# Altium PCB SW3 Logic.PcbDoc
Units mm, origin at the board's own origin, x right, y up, seen from the top; angles counter-clockwise.
Board outline 19.46 x 86.99 mm, 2 copper layers (Top Layer, Bottom Layer), stack 1.58 mm thick; 43 components, 40 nets, 162 pads, 54 vias.
Unrouted connection lines stored in the file: 36.
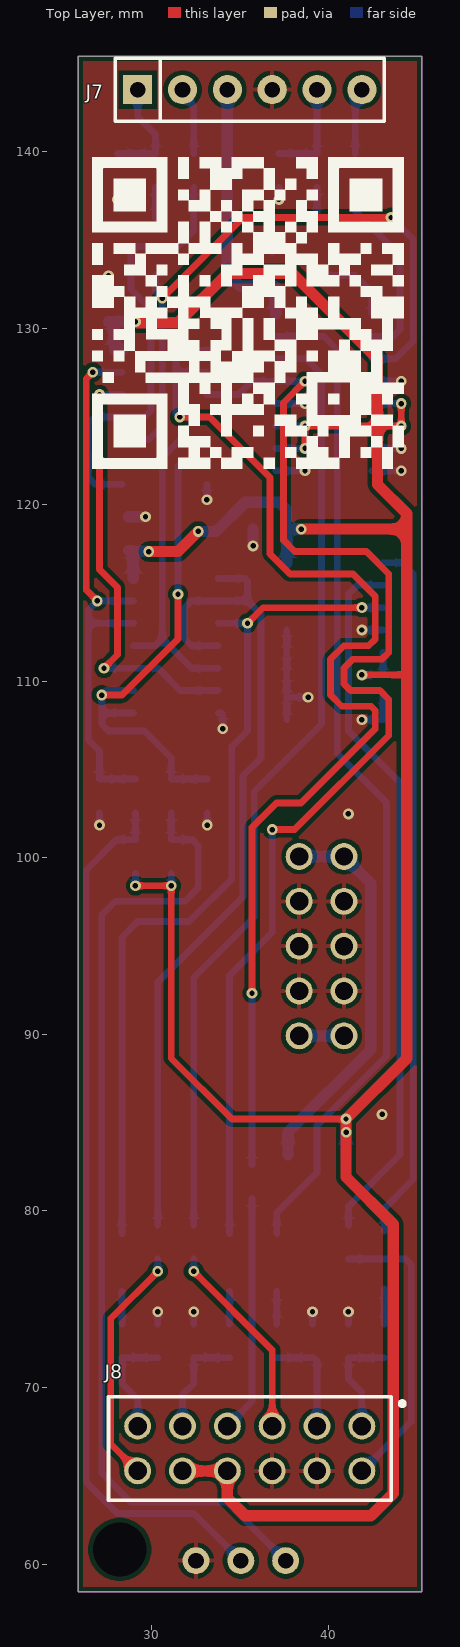
[diagram p0: Top Layer view]
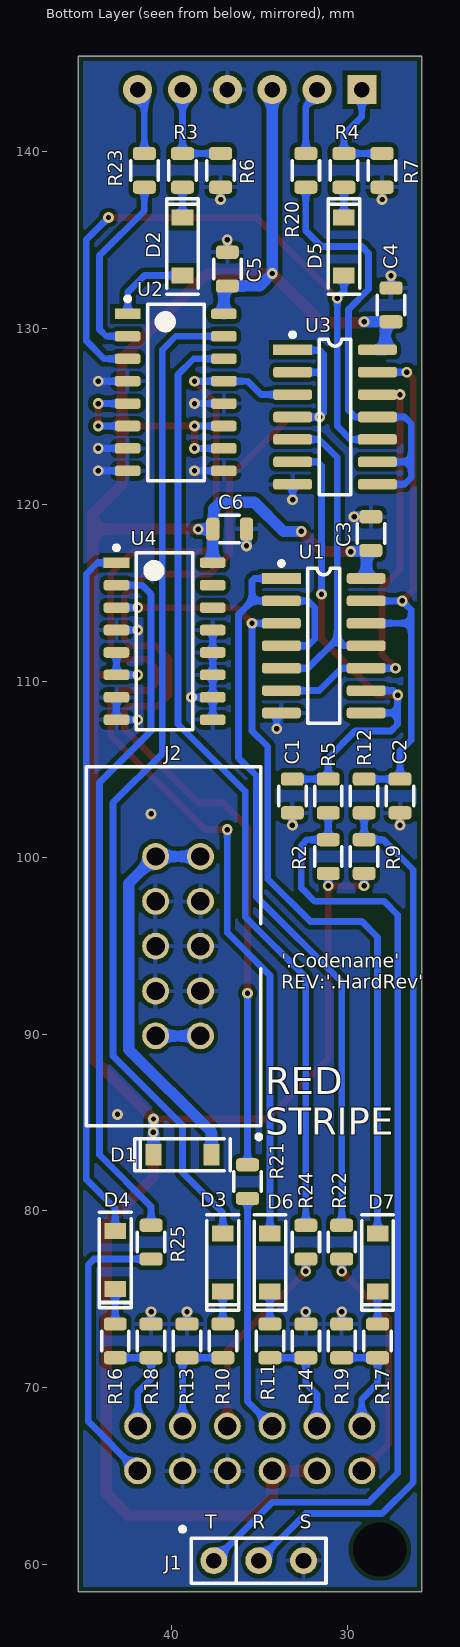
[diagram p1: Bottom Layer view, seen from below]

## Layer stack, top to bottom
Top Solder: solder mask 0.0102, Solder Resist, Dk 3.5
Top Layer: signal copper 0.0356
Dielectric 1: dielectric 1.5086, FR-4, Dk 4.8
Bottom Layer: signal copper 0.0356
Bottom Solder: solder mask 0.0102, Solder Resist, Dk 3.5

## Board outline
25.832,58.42 45.288,58.42 45.288,145.415 25.832,145.415

## Design rules (kind name [scope] priority, off if disabled: settings)
Clearance [All] p1: gap=0.254 ignorepadtopadclearanceinfootprint=FALSE except(0: Arc-Hole Track-Hole SMDPad-Hole THPad-Hole Via-Hole Fill-Hole Poly-Hole Region-Hole Text-Hole)
HoleSize [All] p1: absolutevalues=TRUE maxlimit=2539.975 minlimit=0.025 maxpercent=80.000 minpercent=20.000
PolygonConnect [All] p1: thpad.connectstyle=Relief thpad.reliefconductorwidth=0.254 thpad.reliefentries=4 thpad.polygonreliefangle="90 Angle" thpad.airgapwidth=0.254 smdpad.connectstyle=Relief smdpad.reliefconductorwidth=0.254 smdpad.reliefentries=4 smdpad.polygonreliefangle="90 Angle" smdpad.airgapwidth=0.254 via.connectstyle=Direct via.reliefconductorwidth=0.254 via.reliefentries=4 via.polygonreliefangle="90 Angle" via.airgapwidth=0.254
RoutingVias [All] p1: holewidth=0.711 width=1.27 viastyle="Through Hole" minholewidth=0.711 minwidth=1.27 maxholewidth=0.711 maxwidth=1.27
SilkToSilkClearance [All] p1: silktosilkclearance=0
SilkToSolderMaskClearance [IsPad] p1: minsilkscreentomaskgap=0 clearancetoexposedcopper=TRUE
SolderMaskExpansion [All] p1: expansion=0.102 istentingtop=FALSE
Width [All] p1: maxlimit=25.4 minlimit=0.127 preferedwidth=0.254
27 further rules are at their usual default settings.

## Components (designator, comment, footprint, x,y, rotation, side; value= is the part's Value field where it differs from the comment)
C1 "10000pF" Chip0805 33.147,103.505 r90 bottom
C2 "10000pF" Chip0805 27.051,103.505 r90 bottom
C3 "0.1µF" Chip0805 28.702,118.364 r270 bottom
C4 "0.1µF" Chip0805 27.559,131.318 r270 bottom
C5 "0.1µF" Chip0805 36.83,133.35 r270 bottom
C6 "0.1µF" Chip0805 36.703,118.618 r0 bottom
D1 "1N4148W-7-F" SOD-123 39.37,83.185 r180 bottom
D2 "1N4148W-7-F" SOD-123 39.37,134.62 r270 bottom
D3 "1N4148W-7-F" SOD-123 37.084,77.089 r90 bottom
D4 "1N4148W-7-F" SOD-123 43.18,77.216 r90 bottom
D5 "1N4148W-7-F" SOD-123 30.226,134.62 r270 bottom
D6 "1N4148W-7-F" SOD-123 34.417,77.078 r90 bottom
D7 "1N4148W-7-F" SOD-123 28.321,77.089 r90 bottom
J1 "3-644456-3" TE_3-644456-3 35.052,60.198 r180 bottom
J2 "75869-101LF" IDC_100_2x5 39.624,94.996 r90 bottom
J7 "535584-1" TE_535584-1 35.56,143.51 r0 top
J8 "5-534998-6" TE_5-534998-6 35.56,66.548 r180 top
R2 "100k" Chip0805 31.115,100.076 r270 bottom
R3 "1k" Chip0805 39.37,138.938 r270 bottom
R4 "1k" Chip0805 30.226,138.938 r270 bottom
R5 "1k" Chip0805 31.115,103.505 r90 bottom
R6 "1k" Chip0805 37.211,138.938 r90 bottom
R7 "1k" Chip0805 28.067,138.938 r90 bottom
R9 "100k" Chip0805 29.083,100.076 r270 bottom
R10 "1k" Chip0805 37.084,72.644 r90 bottom
R11 "1k" Chip0805 34.417,72.644 r90 bottom
R12 "1k" Chip0805 29.083,103.505 r90 bottom
R13 "1k" Chip0805 39.116,72.644 r270 bottom
R14 "1k" Chip0805 32.385,72.644 r270 bottom
R16 "1k" Chip0805 43.18,72.644 r90 bottom
R17 "1k" Chip0805 28.321,72.644 r90 bottom
R18 "1k" Chip0805 41.148,72.644 r270 bottom
R19 "1k" Chip0805 30.353,72.644 r270 bottom
R20 "10k" Chip0805 32.385,138.938 r90 bottom
R21 "10k" Chip0805 35.687,81.661 r270 bottom
R22 "10k" Chip0805 30.353,78.232 r270 bottom
R23 "10k" Chip0805 41.529,138.938 r270 bottom
R24 "10k" Chip0805 32.385,78.232 r90 bottom
R25 "10k" Chip0805 41.148,78.232 r90 bottom
U1 "MC14093BDR2G" 14-SOIC 31.369,112.014 r180 bottom
U2 "MC14027BDR2G" 16-SOIC 39.751,126.365 r180 bottom
U3 "MC14093BDR2G" 14-SOIC 30.734,124.968 r180 bottom
U4 "MC14027BDR2G" 16-SOIC 40.386,112.268 r180 bottom

## Footprints (in the part's own frame and the unit in brackets; to place one, negate y for a bottom-side part, rotate by r counter-clockwise, add the part's x,y. Pads: shape width x height; smd on the part's side, far side on the other; paste and mask are expansions set on the pad)
14-SOIC [mm] "SOIC, 14-Leads, Body 8.65x3.90mm, Pitch 1.27mm, IPC Medium Density"
  rect 2.2x0.6 smd: 1(-2.4,3.81)
  rrect50% 2.2x0.6 smd: 2(-2.4,2.54) 3(-2.4,1.27) 4(-2.4,0) 5(-2.4,-1.27) 6(-2.4,-2.54) 7(-2.4,-3.81) 8(2.4,-3.81) 9(2.4,-2.54) 10(2.4,-1.27) 11(2.4,0) 12(2.4,1.27) 13(2.4,2.54) 14(2.4,3.81)
  silkscreen extent -2.53,-4.4 0.9,4.78, body extent -2,-4.4 2,4.4, height 1.75
16-SOIC [mm] "SOIC, 16-Leads, Body 9.90x3.90mm, Pitch 1.27mm, IPC Medium Density"
  rect 1.45x0.6 smd: 1(-2.725,4.445)
  rrect50% 1.45x0.6 smd: 2(-2.725,3.175) 3(-2.725,1.905) 4(-2.725,0.635) 5(-2.725,-0.635) 6(-2.725,-1.905) 7(-2.725,-3.175) 8(-2.725,-4.445) 9(2.725,-4.445) 10(2.725,-3.175) 11(2.725,-1.905) 12(2.725,-0.635) 13(2.725,0.635) 14(2.725,1.905) 15(2.725,3.175) 16(2.725,4.445)
  silkscreen extent -2.85,-5 1.6,5.42, body extent -2,-5 2,5, height 1.75
Chip0805 [mm] "Chip Resistor, 2-Leads, Body 2.05x1.25mm, IPC Medium Density"
  rrect50% 0.75x1.3 smd: 1(-0.955,0) 2(0.955,0)
  silkscreen extent -0.55,-0.77 0.55,0.77, body extent -0.95,-0.55 0.95,0.55, height 0.5
IDC_100_2x5 [mil]
  round 60 hole 41: 1(-200,-50) 2(-100,-50) 3(0,-50) 4(100,-50) 5(200,-50) 6(200,50) 7(100,50) 8(0,50) 9(-100,50) 10(-200,50)
  silkscreen extent -430,-185 400,205, body extent -390,-170 394,195, height 367
SOD-123 [mm] "SOD123"
  rect 0.91x1.22 smd: 1(-1.64,0) 2(1.64,0)
  silkscreen extent -2.7,-0.9 2.7,0.9, body extent -1.92,-0.85 1.92,0.85, height 1.43
TE_3-644456-3 [mil]
  round 60 hole 35: 1(-100,0) 2(0,0) 3(100,0)
  silkscreen extent -175,-50 150,75, body extent -144,-46 144,46, height 395
TE_5-534998-6 [mil]
  round 60 hole 41: 1(-250,-50) 2(-150,-50) 3(-50,-50) 4(50,-50) 5(150,-50) 6(250,-50) 7(250,50) 8(150,50) 9(50,50) 10(-50,50) 11(-150,50) 12(-250,50)
  silkscreen extent -345,-115 315,115, body extent -300,-99 300,99, height 265
TE_535584-1 [mil]
  rect 65x65 hole 35: 1(-250,0)
  round 65 hole 35: 2(-150,0) 3(-50,0) 4(50,0) 5(150,0) 6(250,0)
  silkscreen extent -300,-70 300,70, body extent -300,-70 300,70, height 265

## Part data
C1 C2: library part C2012C0G1H103J060AA, "CAP CER 10000PF 50V 5% NP0 0805", Manufacturer="TDK Corporation", Operating Temperature="-55°C ~ 125°C", Package / Case="0805 (2012 Metric)", Ratings=-, Supplier Part Number 1=445-7519-1-ND, Temperature Coefficient="C0G, NP0", Tolerance=±5%, Voltage=50V, Applications="General Purpose", Capacitance=10000pF, Features=-, Height - Seated (Max)=-, HelpURL=http://product.tdk.com/capacitor/mlcc/en/documents/mlcc_commercial_general_en.pdf, Lead Spacing=-, Lead Style=-, Manufacturer Part Number=C2012C0G1H103J060AA, Mounting Type="Surface Mount, MLCC", PartNumber=C2012C0G1H103J060AA, Series=C, Size / Dimension="0.079\" L x 0.049\" W (2.00mm x 1.25mm)", Supplier 1=Digi-Key, Supplier 2=Mouser, Thickness (Max)="0.028\" (0.70mm)"
C3 C4 C5 C6: library part C2012X7T2E104K125AA, "CAP CER 0.1UF 250V 10% X7T 0805", Manufacturer="TDK Corporation", Operating Temperature="-55°C ~ 125°C", Package / Case="0805 (2012 Metric)", Ratings=-, Supplier Part Number 1=445-7749-1-ND, Temperature Coefficient=X7T, Tolerance=±10%, Voltage=250V, Applications="General Purpose", Capacitance=0.1µF, Features=-, Height - Seated (Max)=-, HelpURL=http://product.tdk.com/capacitor/mlcc/en/documents/mlcc_commercial_midvoltage_en.pdf, Lead Spacing=-, Lead Style=-, Manufacturer Part Number=C2012X7T2E104K125AA, Mounting Type="Surface Mount, MLCC", PartNumber=C2012X7T2E104K125AA, Series=C, Size / Dimension="0.079\" L x 0.049\" W (2.00mm x 1.25mm)", Supplier 1=Digi-Key, Supplier 2=Mouser, Thickness (Max)="0.057\" (1.45mm)"
D1 D2 D3 D4 D5 D6 D7: "DIODE SWITCH 100V 0.15A SOD123", Capacitance @ Vr, F="2pF @ 0V, 1MHz", Current - Average Rectified (Io)=150mA, Current - Reverse Leakage @ Vr="1µA @ 75V", Manufacturer="Diodes Incorporated", Operating Temperature - Junction="-65°C ~ 150°C", Package / Case=SOD-123, Supplier Part Number 1=1N4148W-FDICT-ND, Voltage - DC Reverse (Vr) (Max)=100V, Voltage - Forward (Vf) (Max) @ If="1.25V @ 150mA", Datasheets=http://www.diodes.com/datasheets/ds30086.pdf, Diode Type=Standard, Manufacturer Part Number=1N4148W-7-F, Mounting Type="Surface Mount", PartNumber=1N4148W-7-F, Reverse Recovery Time (trr)=4ns, Series=0, Speed="Small Signal =< 200mA (Io), Any Speed", Supplier 1=Digi-Key, Supplier Device Package=SOD-123
J1: "CONN HEADER VERT 3POS .100 TIN", Color=Natural, Manufacturer="TE Connectivity", Supplier Part Number 1=A31113-ND, Connector Type="Header, Unshrouded", Contact Finish=Tin, Contact Finish Thickness="150µin (3.81µm)", Contact Mating Length="0.295\" (7.49mm)", Contact Type="Male Pin", Fastening Type=-, Features=-, HelpURL=http://www.te.com/commerce/DocumentDelivery/DDEController?Action=srchrtrv&DocNm=644456&DocType=Customer+Drawing&DocLang=English, Manufacturer Part Number=3-644456-3, Mounting Type="Through Hole", Number of Positions=3, Number of Positions Loaded=All, Number of Rows=1, PartNumber=3-644456-3, Pitch="0.100\" (2.54mm)", Row Spacing=-, Series="MTA-100, AMP", Supplier 1=Digi-Key, Supplier 2=Mouser, Supplier Part Number 2=571-3-644456-3, Termination=Solder
J2: "CONN HEADER 10POS DUAL VERT PCB", Color=Blue, Manufacturer=FCI, Supplier Part Number 1=609-1774-ND, Connector Type="Header, Shrouded", Contact Finish="Gold, GXT™", Contact Finish Thickness="30µin (0.76µm)", Contact Mating Length="0.236\" (6.00mm)", Contact Type="Male Pin", Fastening Type=-, Features=-, HelpURL=http://portal.fciconnect.com/Comergent//fci/drawing/75869.pdf, Manufacturer Part Number=75869-101LF, Mounting Type="Through Hole", Number of Positions=10, Number of Positions Loaded=All, Number of Rows=2, PartNumber=75869-101LF, Pitch="0.100\" (2.54mm)", Row Spacing="0.100\" (2.54mm)", Series="Quickie™, Basics+", Supplier 1=Digi-Key, Supplier 2=Mouser, Supplier Part Number 2=649-75869-101LF, Termination=Solder
J7: "CONN RECEPT 6POS .100 VERT", Manufacturer="TE Connectivity AMP Connectors", Supplier Part Number 1=A115379-ND, HelpURL=https://www.te.com/commerce/DocumentDelivery/DDEController?Action=srchrtrv&DocNm=535584&DocType=Customer+Drawing&DocLang=English, Manufacturer Part Number=535584-1, PartNumber=535584-1, Supplier 1=Digi-Key, Supplier 2=Mouser, Supplier Part Number 2=571-535584-1
J8: "CONN RECEPT 12POS .100 VERT DUAL", Color=Black, Manufacturer="TE Connectivity AMP Connectors", Supplier Part Number 1=A32956-ND, Connector Type="Receptacle, Bottom or Top Entry", Contact Finish=Gold, Contact Finish Thickness="30µin (0.76µm)", Contact Type="Female Socket", Fastening Type=-, Features=-, HelpURL=http://www.te.com/commerce/DocumentDelivery/DDEController?Action=srchrtrv&DocNm=534998&DocType=Customer+Drawing&DocLang=English, Manufacturer Part Number=5-534998-6, Mounting Type="Through Hole", Number of Positions=12, Number of Positions Loaded=All, Number of Rows=2, PartNumber=5-534998-6, Pitch="0.100\" (2.54mm)", Row Spacing="0.100\" (2.54mm)", Series="AMPMODU Mod IV", Supplier 1=Digi-Key, Supplier 2=Mouser, Supplier Part Number 2=571-5-534998-6, Termination=Solder
R2 R9: library part CRCW0805100KFKEA, "RES 100K OHM 1/8W 1% 0805 SMD", Manufacturer="Vishay Dale", Package / Case="0805 (2012 Metric)", Power (Watts)="0.125W, 1/8W", Supplier Part Number 1=541-100KCCT-ND, Temperature Coefficient=±100ppm/°C, Tolerance=±1%, Composition="Thick Film", Features="Automotive AEC-Q200 Qualified", Height="0.020\" (0.50mm)", HelpURL=http://www.vishay.com/doc?20035, Manufacturer Part Number=CRCW0805100KFKEA, Number of Terminations=2, PartNumber=CRCW0805100KFKEA, Resistance=100k, Series=CRCW, Size / Dimension="0.079\" L x 0.049\" W (2.00mm x 1.25mm)", Supplier 1=Digi-Key, Supplier 2=Mouser, Supplier Device Package="0805 (2012 Metric)"
R3 R4 R5 R6 R7 R10 R11 R12 R13 R14 R16 R17 R18 R19: library part CRCW08051K00FKEA, "RES 1.00K OHM 1/8W 1% 0805 SMD", Manufacturer="Vishay Dale", Package / Case="0805 (2012 Metric)", Power (Watts)="0.125W, 1/8W", Supplier Part Number 1=541-1.00KCCT-ND, Temperature Coefficient=±100ppm/°C, Tolerance=±1%, Composition="Thick Film", Features="Automotive AEC-Q200 Qualified", Height="0.020\" (0.50mm)", HelpURL=http://www.vishay.com/doc?20035, Manufacturer Part Number=CRCW08051K00FKEA, Number of Terminations=2, PartNumber=CRCW08051K00FKEA, Resistance=1k, Series=CRCW, Size / Dimension="0.079\" L x 0.049\" W (2.00mm x 1.25mm)", Supplier 1=Digi-Key, Supplier 2=Mouser, Supplier Device Package="0805 (2012 Metric)"
R20 R21 R22 R23 R24 R25: library part CRCW080510K0FKEA, "RES 10.0K OHM 1/8W 1% 0805 SMD", Manufacturer="Vishay Dale", Package / Case="0805 (2012 Metric)", Power (Watts)="0.125W, 1/8W", Supplier Part Number 1=541-10.0KCCT-ND, Temperature Coefficient=±100ppm/°C, Tolerance=±1%, Composition="Thick Film", Features="Automotive AEC-Q200 Qualified", Height="0.020\" (0.50mm)", HelpURL=http://www.vishay.com/doc?20035, Manufacturer Part Number=CRCW080510K0FKEA, Number of Terminations=2, PartNumber=CRCW080510K0FKEA, Resistance=10k, Series=CRCW, Size / Dimension="0.079\" L x 0.049\" W (2.00mm x 1.25mm)", Supplier 1=Digi-Key, Supplier 2=Mouser, Supplier Device Package="0805 (2012 Metric)"
U1 U3: "IC GATE NAND 4CH 2-INP 14SOIC", Manufacturer=onsemi, Supplier Part Number 1=MC14093BDR2GOSCT-ND, HelpURL=https://www.onsemi.com/pdf/datasheet/mc14093b-d.pdf, Manufacturer Part Number=MC14093BDR2G, PartNumber=MC14093BDR2G, Supplier 1=Digi-Key, Supplier 2=Mouser, Supplier Part Number 2=863-MC14093BDR2G
U2 U4: "IC FF JK TYPE DUAL 1BIT 16SOIC", Manufacturer=onsemi, Supplier Part Number 1=MC14027BDR2GOSTR-ND, HelpURL=https://www.onsemi.com/pdf/datasheet/mc14027b-d.pdf, Manufacturer Part Number=MC14027BDR2G, PartNumber=MC14027BDR2G, Supplier 1=Digi-Key, Supplier 2=Mouser, Supplier Part Number 2=863-MC14027BDR2G

## Free pads (board coordinates)
  round 1.524 hole 3.048: 0(28.194,60.833)

## Via types
v1: diameter 0.61, hole 0.305, Top Layer to Bottom Layer, tented both sides, 54 vias

## Nets (pads, with @x,y where several pads share a name; then routed paths per layer and width w, separated by ;. In a path a pad name is that pad's centre, name@x,y a point inside that pad or via, vN(x,y) a via of type N, cw(c..) or ccw(c..) an arc to the next point about the centre after c; other vN are vias at no path point)
+12V: C3.2 C4.2 C5.2 C6.2 D1.1 J7.3 J8.8 J8.9 R2.2 R9.2 U1.14 U2.5 U2.6 U2.10 U2.11 U2.16 U3.14 U4.5 U4.6 U4.16 | length 185.3
  Top Layer w0.381: v1(29.083,98.425) v1(31.115,98.425) 31.115,88.646 34.555,85.206 v1(41.01,85.206) ; v1(38.69,123.19) v1(38.69,124.46) 42.799,124.46 v1(44.14,124.46) v1(44.14,125.73) ; v1(41.91,110.363) 44.45,110.363
  Top Layer w0.635: v1@29.206,130.306 31.5,130.306 v1(34.29,133.096) 37.973,133.096 42.799,128.27 42.799,124.46 42.799,121.158 44.45,119.507 44.45,118.618 ; v1(29.845,117.348) 31.496,117.348 v1(32.639,118.491) ; J8.8 J8.9 34.29,63.754 35.306,62.738 42.418,62.738 43.688,64.008 43.688,79.248 41.01,81.926 v1(41.01,85.206) 44.45,88.646 44.45,110.363 44.45,118.618 ; v1(38.481,118.618) 44.45,118.618
  Bottom Layer w0.381: v1(29.083,98.425) R9.2 ; v1(31.115,98.425) R2.2 ; U2.10 v1(38.69,123.19) ; U2.11 v1(38.69,124.46) ; v1(41.91,110.363) U4.6 U4.5 ; U2.6 v1(44.14,124.46) ; U2.5 v1(44.14,125.73)
  Bottom Layer w0.635: C4.2 C4.2@27.834,130.363 ; U3.14 27.909,128.778 27.892,128.796 27.892,130.306 C4.2@27.834,130.363 ; U1.14 28.956,115.837 C3.2@28.956,117.352 ; v1(29.083,130.363) C4.2@27.834,130.363 ; v1(29.845,117.348) 29.841,117.352 C3.2@28.956,117.352 ; v1(32.639,118.491) 33.655,118.491 35.306,120.142 37.229,120.142 37.6,119.77 37.6,118.676 C6.2 ; J7.3 v1(34.29,133.096) 34.991,132.395 C5.2 36.969,132.395 37.026,132.338 U2.16 ; U4.16 37.66,116.715 37.66,118.616 C6.2 ; v1(38.481,118.618) C6.2 ; D1.1 v1(41.01,85.206) ; C3.2@28.956,117.352 28.76,117.352 C3.2 28.898,117.409 C3.2@28.956,117.352
  other v1: 41.021,84.455
GND: C1.1 C2.1 C3.1 C4.1 C5.1 C6.1 J1.3 J2.2 J2.3 J2.4 J2.7 J2.8 J2.9 J7.4 J8.10 J8.11 R6.1 R7.1 R13.1 R14.1 R18.1 R19.1 U1.7 U2.4 U2.7 U2.8 U2.9 U2.12 U3.7 U4.4 U4.7 U4.8 U4.9 U4.10 U4.11 U4.12 U4.13 | length 29.1
  Bottom Layer w0.381: v1(27.051,101.854) C2.1 ; C4.1 v1(27.559,132.969) ; v1(28.067,137.287) R7.1 ; R19.1 v1(30.353,74.295) ; R14.1 v1(32.385,74.295) ; v1(33.134,120.282) U3.7 ; v1(33.147,101.854) C1.1 ; U1.7 33.927,108.204 34.036,108.095 v1(34.036,107.315) ; C5.1 v1(36.83,135.001) ; U2.9 v1(38.69,121.92) ; U2.12 v1(38.69,125.73) ; v1(37.211,137.287) R6.1 ; U4.9 U4.10 ; U4.13 U4.11 U4.10 ; v1(38.862,109.093) U4.10 ; R13.1 v1(39.116,74.295) ; R18.1 v1(41.148,74.295) ; v1(41.91,107.823) U4.8 U4.7 ; v1(41.91,112.903) U4.4 ; U2.8 v1(44.14,121.92) ; U2.7 v1(44.14,123.19) ; U2.4 v1(44.14,127)
  Bottom Layer w0.635: C3.1 v1(29.652,119.319) ; C6.1 v1(35.748,117.668) v1@35.756,117.66
  other v1: 43.053,85.471 41.148,102.489
LED1: J7.2 R20.2 | length 3.9
  Bottom Layer w0.381: J7.2 31.75,143.201 32.385,142.566 R20.2
LED2: J7.6 R23.1 | length 3.9
  Bottom Layer w0.381: R23.1 41.529,142.82 41.91,143.201 J7.6 J7.6@41.974,143.446
LED3: J8.4 R21.2 | length 13.5
  Bottom Layer w0.381: J8.4 35.687,69.215 R21.2
LED4: J8.3 R24.1 | length 11.3
  Top Layer w0.381: v1(32.385,76.581) 36.83,72.136 J8.3
  Bottom Layer w0.381: v1(32.385,76.581) R24.1
LED5: J8.7 R22.2 | length 13.7
  Top Layer w0.381: J8.7 27.686,66.802 27.686,73.914 v1(30.353,76.581)
  Bottom Layer w0.381: v1(30.353,76.581) R22.2
LED6: J8.12 R25.1 | length 16.5
  Bottom Layer w0.381: R25.1 44.389,77.277 44.704,76.962 44.704,68.072 J8.12
NetD1_2: D1.2 J2.5 J2.6 | length 22
  Bottom Layer w0.635: D1.2 37.73,84.466 42.418,89.154 42.418,98.552 J2.6 J2.5
NetD2_1: D2.1 R3.2 | length 1.7
  Bottom Layer w0.381: D2.1 R3.2
NetD2_2: D2.2 U2.1 | length 4.7
  Bottom Layer w0.381: D2.2 41.518,132.98 42.476,132.022 U2.1
NetD3_1: D3.1 R10.2 | length 1.9
  Bottom Layer w0.381: R10.2 D3.1
NetD3_2: D3.2 U2.15 | length 57.6
  Bottom Layer w0.381: U2.15 39.751,129.54 40.513,128.778 40.513,105.918 43.307,103.124 43.307,88.773 39.37,84.836 39.37,82.169 37.084,79.883 D3.2
NetD4_1: D4.1 R16.2 | length 2
  Bottom Layer w0.381: R16.2 D4.1
NetD4_2: D4.2 U4.1 | length 39.9
  Bottom Layer w0.381: U4.1 44.196,116.713 44.819,116.09 44.819,81.776 43.18,80.137 D4.2
NetD5_1: D5.1 R4.2 | length 1.7
  Bottom Layer w0.381: D5.1 R4.2
NetD5_2: D5.2 U2.3 U3.10 | length 36.4
  Top Layer w0.381: v1(30.607,131.699) 35.179,136.271 v1(43.561,136.271)
  Bottom Layer w0.381: U3.10 29.845,123.698 30.607,124.46 v1(30.607,131.699) 30.226,132.08 D5.2 ; U2.3 43.815,128.27 44.819,129.274 44.819,135.013 v1(43.561,136.271)
NetD6_1: D6.1 R11.2 | length 1.8
  Bottom Layer w0.381: R11.2 D6.1
NetD6_2: D6.2 U2.13 U3.3 | length 68
  Top Layer w0.381: v1(36.83,101.6) 38.1,101.6 43.434,106.934 43.434,108.966 42.926,109.474 41.275,109.474 40.894,109.855 40.894,110.744 41.402,111.252 43.053,111.252 43.434,111.633 43.434,116.078 42.164,117.348 38.109,117.348 37.465,117.992 37.465,125.775 v1(38.69,127)
  Bottom Layer w0.381: U3.3 34.925,126.238 35.687,127 U2.13 v1(38.69,127) ; D6.2 34.417,93.345 36.83,95.758 v1(36.83,101.6)
NetD7_1: D7.1 R17.2 | length 1.9
  Bottom Layer w0.381: R17.2 D7.1
NetD7_2: D7.2 U1.3 U4.3 | length 48.9
  Top Layer w0.381: v1(35.433,113.284) 36.322,114.173 v1(41.91,114.173)
  Bottom Layer w0.381: D7.2 28.321,95.504 29.21,96.393 32.131,96.393 34.544,98.806 34.544,106.299 35.433,107.188 v1(35.433,113.284) U1.3 ; v1(41.91,114.173) U4.3
NetJ2_1: J2.1 J2.10 | length 2.7
  Bottom Layer w0.635: J2.1@38.354,89.724 J2.1 J2.10
NetR20_1: R20.1 U3.8 U3.9 U3.11 | length 26.8
  Bottom Layer w0.381: U3.8 26.797,121.158 26.416,121.539 26.416,122.428 ; U3.9 26.416,122.428 ; R20.1 32.385,135.509 31.496,134.62 29.21,134.62 28.829,134.239 28.829,132.207 29.972,131.064 29.972,125.349 29.591,124.968 U3.11 26.797,124.968 26.416,124.587 26.416,122.428
NetR21_1: R21.1 U3.1 U3.2 U3.4 | length 66.4
  Top Layer w0.381: v1(31.592,124.968) 33.274,124.968 36.703,121.539 36.703,117.221 37.846,116.078 41.402,116.078 42.672,114.808 42.672,112.395 42.291,112.014 40.894,112.014 40.132,111.252 40.132,109.22 40.767,108.585 42.436,108.585 42.659,108.362 42.659,107.302 38.466,103.109 37.069,103.109 35.687,101.727 v1(35.687,92.329)
  Bottom Layer w0.381: U3.4 v1(31.592,124.968) 31.369,125.191 31.369,127.508 ; U3.2 31.369,127.508 ; U3.1 33.103,128.747 31.592,128.747 31.369,128.523 31.369,127.508 ; R21.1 v1(35.687,92.329)
NetR22_1: R22.1 U1.1 U1.2 U1.4 | length 48.5
  Bottom Layer w0.381: R22.1 30.353,92.964 35.179,97.79 35.179,104.648 36.195,105.664 36.195,113.792 35.433,114.554 ; U1.4 32.258,112.014 31.877,112.395 31.877,114.173 32.258,114.554 U1.2 35.433,114.554 ; U1.1 35.306,115.824 35.433,115.697 35.433,114.554
NetR23_2: R23.2 U2.2 | length 10.9
  Bottom Layer w0.381: R23.2 41.529,136.652 44.069,134.112 44.069,129.921 43.688,129.54 U2.2
NetR24_2: R24.2 U2.14 | length 54.2
  Bottom Layer w0.381: R24.2 32.385,93.218 35.814,96.647 35.814,103.759 39.624,107.569 39.624,127.381 38.735,128.27 U2.14
NetR25_2: R25.2 U4.2 | length 40.3
  Bottom Layer w0.381: R25.2 41.148,80.264 44.069,83.185 44.069,104.267 41.148,107.188 41.148,114.935 41.656,115.443 U4.2
OUT_A_LTCH: J7.5 R3.1 R6.2 | length 5.8
  Bottom Layer w0.381: R6.2 R3.1 J7.5
OUT_A_MOM: J7.1 R4.1 R7.2 | length 6.2
  Bottom Layer w0.381: R7.2 R4.1 30.226,140.97 29.21,141.986 J7.1
OUT_B_LTCH: J8.2 R10.1 R13.2 | length 6
  Bottom Layer w0.381: R10.1 R13.2 39.185,71.689 39.37,71.505 J8.2
OUT_B_MOM: J8.5 R11.1 R14.2 | length 6.2
  Bottom Layer w0.381: J8.5 31.75,69.596 32.385,70.231 R14.2 R11.1
OUT_C_LTCH: J8.1 R16.1 R18.2 | length 6.2
  Bottom Layer w0.381: J8.1 41.91,69.723 41.148,70.485 R18.2 R16.1
OUT_C_MOM: J8.6 R17.1 R19.2 | length 6.3
  Bottom Layer w0.381: J8.6 29.21,69.342 28.321,70.231 R17.1 R19.2
RING: J1.2 R9.1 R12.1 | length 50.3
  Bottom Layer w0.381: R12.1 R9.1 28.006,101.031 26.301,99.326 26.301,64.631 28.067,62.865 32.385,62.865 J1.2
RING_DB: C2.2 R12.2 U1.12 U1.13 U3.13 | length 32.4
  Top Layer w0.381: v1(26.67,127.508) 26.301,127.139 26.301,115.177 v1(26.924,114.554)
  Bottom Layer w0.381: v1(26.67,127.508) U3.13 ; C2.2@27.178,104.587 C2.2 ; U1.12 26.416,113.284 ; U1.13 v1(26.924,114.554) 26.416,114.046 26.416,113.284 ; R12.2 C2.2 ; 26.416,113.284 26.416,109.982 26.416,106.68 27.051,106.045 C2.2
RING_DB_N: U1.5 U1.11 U3.5 | length 18.9
  Bottom Layer w0.381: U1.11 30.226,112.014 30.607,112.395 ; U3.5 31.623,123.698 30.607,122.682 30.607,112.395 ; U1.5 32.258,110.744 30.607,112.395
TIP: J1.1 R2.1 R5.1 | length 55.8
  Bottom Layer w0.381: R5.1 R2.1 32.319,101.031 32.639,100.711 32.639,98.298 31.877,97.536 27.94,97.536 27.178,96.774 27.178,65.151 28.829,63.5 34.29,63.5 J1.1
TIP_DB: C1.2 R5.2 U1.8 U1.9 U3.6 | length 30.5
  Top Layer w0.381: v1(27.178,109.22) 28.321,109.22 31.496,112.395 v1(31.496,114.935)
  Bottom Layer w0.381: U1.8 27.178,108.204 ; U1.9 27.432,109.474 v1(27.178,109.22) 27.178,108.204 ; v1(31.496,114.935) 31.496,122.205 31.719,122.428 U3.6 ; C1.2 R5.2 31.115,105.664 29.591,107.188 27.559,107.188 27.178,107.569 27.178,108.204
TIP_DB_N: U1.6 U1.10 U3.12 | length 24.5
  Top Layer w0.381: v1(27.051,126.238) 27.051,116.332 28.067,115.316 28.067,111.506 v1(27.305,110.744)
  Bottom Layer w0.381: v1(27.051,126.238) U3.12 ; v1(27.305,110.744) U1.10 30.353,110.744 31.623,109.474 U1.6
pads on no net: U4.14 U4.15

## Polygon pours and split planes (outlines as drawn)
GND on Bottom Layer "GND_L02_P001" (solid, remove dead copper, pour order 1): 25.832,145.415 45.288,145.415 45.288,58.42 25.832,58.42
GND on Top Layer "GND_L01_P000" (solid, remove dead copper, pour order 0): 25.832,145.415 45.288,145.415 45.288,58.42 25.832,58.42

## Keep-outs
Keep-Out Layer:
  the board outline again, w0.05

## Silkscreen, mask and mechanical layers (free items; w line width, h text height)
Top Overlay:
  drawing of 67 lines, arcs and shapes, not listed
Bottom Overlay:
  text "'.Codename'  / REV:'.HardRev'" at 33.782,92.583 h0.79
  text "RED / STRIPE" at 34.671,84.328 h1.52
  text "S" at 32.741,62.001 h0.79
  text "R" at 35.408,62.001 h0.79
  text "T" at 38.075,62.001 h0.79
Top Solder:
  text "é" at 27.287,82.061 h16.51
Mechanical 1:
  the board outline again, w0.05
Mechanical 2:
  lines w0.05: 25.832,38.735 25.832,145.415 45.288,145.415 45.288,38.735 ; 25.832,58.42 45.288,58.42 ; 25.4,25.4 25.4,158.75 45.72,158.75 45.72,25.4 25.4,25.4 ; 25.578,27.432 45.542,27.432 45.542,155.956 25.578,155.956 25.578,27.432